# Altium PCB old_Sampler_DIOT.PCBDOC (part 5 of 8)
Units mm, origin at the board's own origin, x right, y up, seen from the top; angles counter-clockwise.
Board outline 221.17 x 100 mm, 4 copper layers (Top, GP1(GND), L3, Bot), stack 1.648 mm thick; 664 components, 413 nets, 2128 pads, 926 vias.
Unrouted connection lines stored in the file: 1.
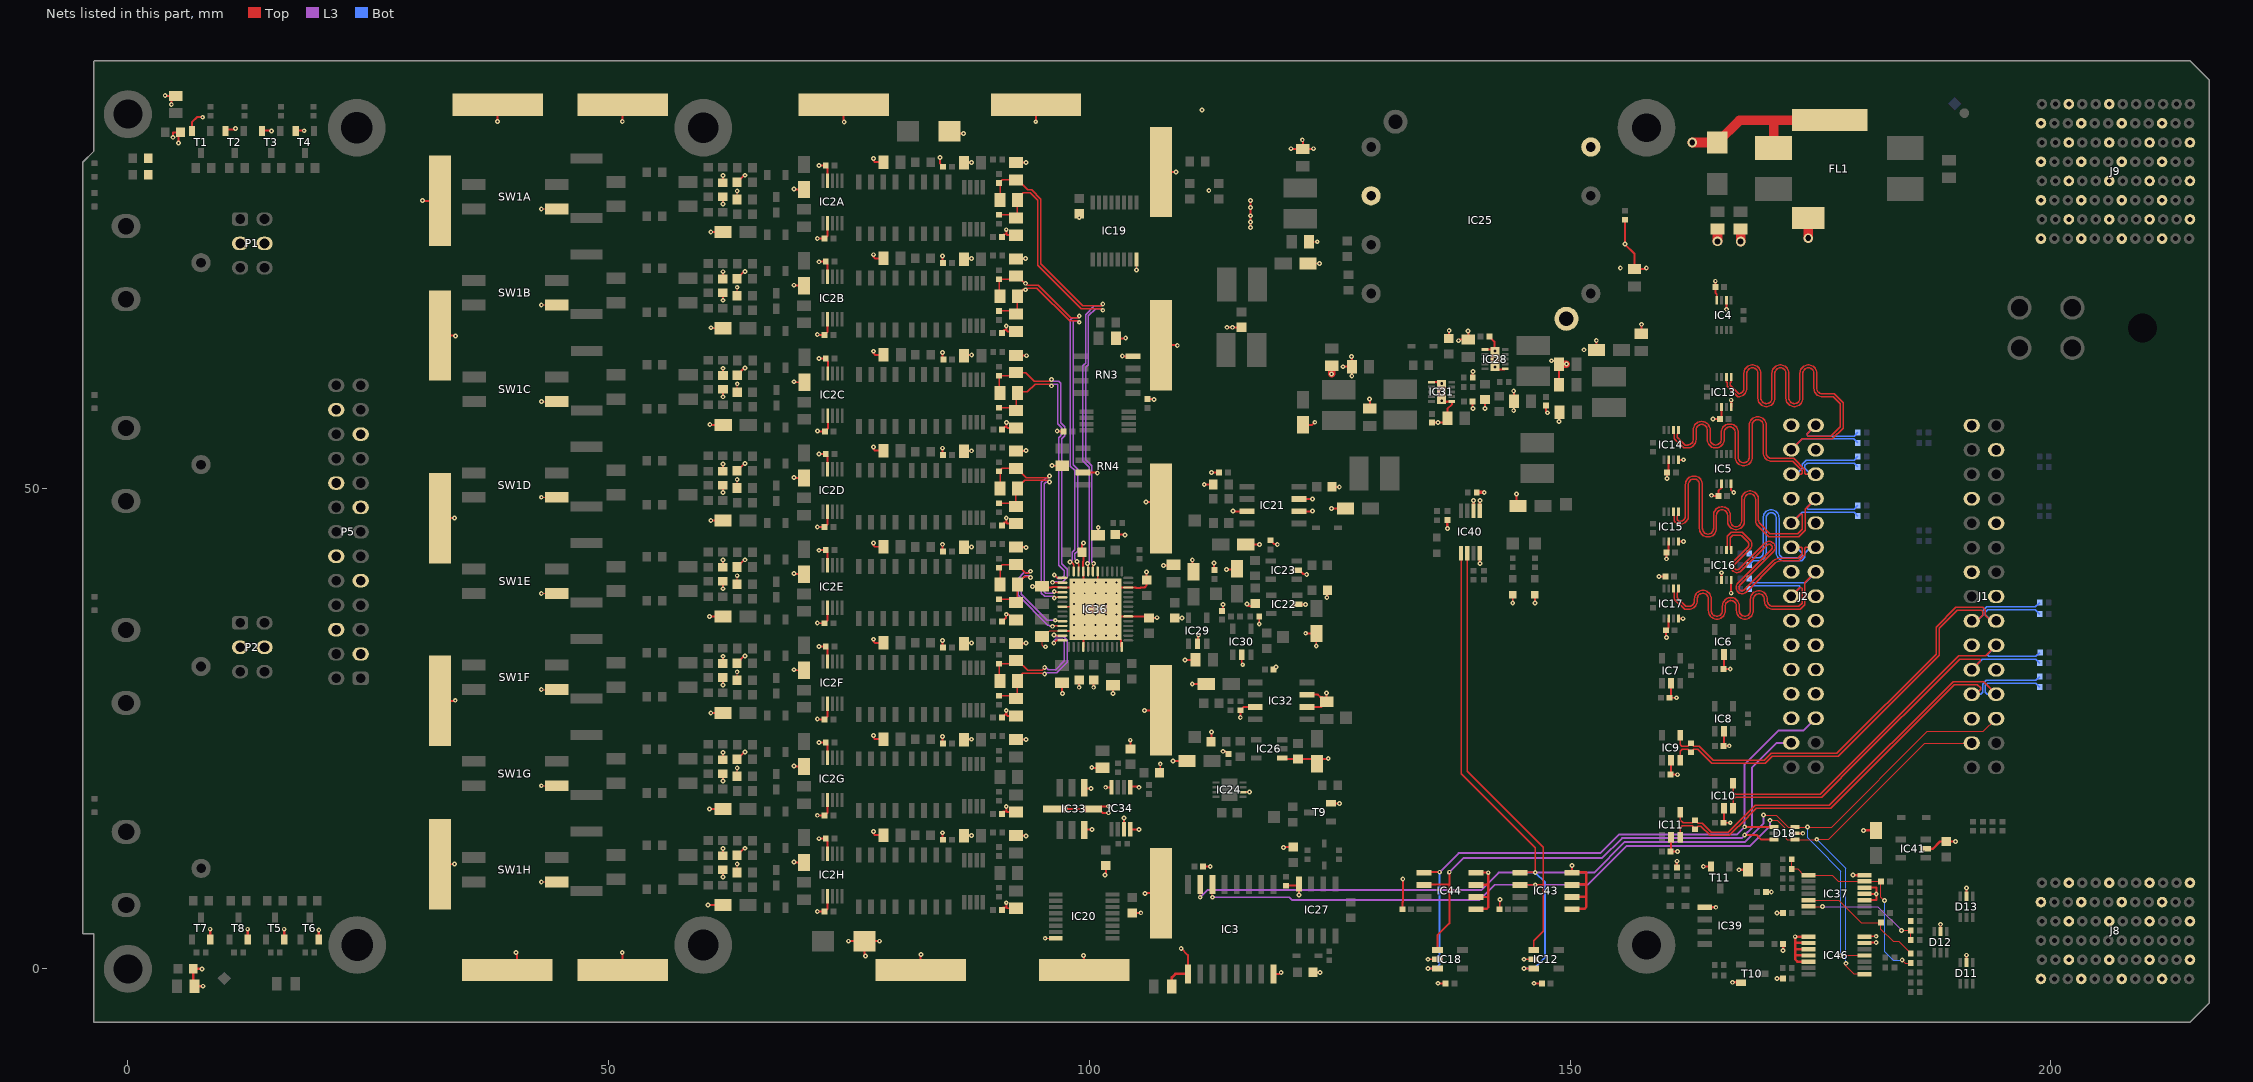
[diagram p6: the nets of this part, all layers, seen from the top]

## Via types
v1: diameter 0.5, hole 0.2, Top to Bot, tented both sides, 694 vias
v2: diameter 0.5, hole 0.2, Top to Bot, 186 vias
v3: diameter 0.6, hole 0.3, Top to Bot, tented both sides, 24 vias
v4: diameter 1, hole 0.6, Top to Bot, tented both sides, 12 vias
v5: diameter 0.6, hole 0.3, Top to Bot, 6 vias
v6: diameter 0.406, hole 0.203, Top to Bot, 2 vias
v7: diameter 1.27, hole 0.711, Top to Bot, 2 vias

## Nets (pads, with @x,y where several pads share a name; then routed paths per layer and width w, separated by ;. In a path a pad name is that pad's centre, name@x,y a point inside that pad or via, vN(x,y) a via of type N, cw(c..) or ccw(c..) an arc to the next point about the centre after c; other vN are vias at no path point) (continued)
EEM0_I2C.SCL: D18.1 IC3.14 IC12.1 IC40.2 IC43.6 IC46.1 J1.27 | length 153.9
  Top w0.127: v1(112.789,7.45) IC3.14@112.789,8.78 ; v2(170.775,15.45) 171.525,15.45 172.3,14.675 172.3,13.75 172.6,13.45 D18.1@173.4,13.45 175.625,13.45 v1(175.65,13.475) 176.875,13.475 186.89,23.49 J1.27@191.772,23.49 ; v2(178.675,0.575) 178.55,0.45 178.55,0.446 179.504,-0.508 IC46.1@180.631,-0.508
  Top w0.152: IC40.2@139.305,43.25 139.305,20.556 147.201,12.66 147.201,8.75 ; IC43.6@144.8,8.735 144.815,8.75 v2(146.371,8.75) 147.201,8.75 ; IC12.1@146.2,1.95 146.2,2.9 147.201,3.901 147.201,8.75
  L3 w0.203: v1(112.789,7.45) 120.785,7.45 121.046,7.188 121.067,7.188 ; 121.067,7.168 140.593,7.168 142.175,8.75 v2(146.371,8.75) 151.85,8.75 155.9,12.8 168.726,12.8 170.775,14.849 v2(170.775,15.45)
  Bot w0.127: v1(175.65,13.475) 178.675,10.45 178.675,9.1 v2(178.675,0.575)
EEM0_I2C.SDA: D18.3 IC3.15 IC12.3 IC40.1 IC43.5 IC46.4 J1.26 | length 161.4
  Top w0.127: v1(111.519,7.45) IC3.15@111.519,8.78 ; v2(170.1,16) 171.45,16 172.7,14.75 D18.3@173.4,14.75 v2(174.7,14.75) 177.2,14.75 187.15,24.7 192.982,24.7 J1.26@194.312,26.03 ; v2(178.159,1.4) 178.201,1.442 IC46.4@180.631,1.442
  Top w0.152: IC40.1@138.655,43.25 138.655,20.293 146.371,12.577 v2@146.371,10.055 ; IC43.5@145.03,10.055 v2@146.185,10.055 ; v2@146.22,10.02 v2@146.185,10.055 ; v2(146.371,10.02) v2@146.371,10.055 ; v2@146.185,10.055 v2@146.371,10.055
  Top w0.203: v2(145.2,0.05) IC12.3@146.2,0.05
  L3 w0.203: v1(111.519,7.45) 112.264,8.195 140.74,8.195 142.565,10.02 v2(146.371,10.02) 152.495,10.02 155.675,13.2 168.2,13.2 170.1,15.1 v2(170.1,16)
  Bot w0.127: v2(174.7,14.75) 174.7,13.625 175.525,12.8 178.159,10.166 v2(178.159,1.4)
  Bot w0.203: v2(145.2,0.05) 146.25,0.05 147.4,1.2 147.4,8.991 v2(146.371,10.02)
EEM_IO.LVDS_N5: IC9.4 J1.18 R18.1 R143.2 | length 51.5
  Top w0.152: IC9.4@161.45,24.3 161.45,23.324 161.622,23.152 162.232,23.152 R18.1@162.55,23.47 162.868,23.152 163.423,23.152 164.875,21.7 170.175,21.7 170.905,22.43 177.755,22.43 188.07,32.745 188.07,35.551 190.121,37.602 192.899,37.602 193.195,37.307 193.195,36.781 193.785,36.19 J1.18@194.312,36.19
  Bot w0.152: J1.18@194.312,36.19 193.82,36.19 193.195,36.816 193.195,37.101 193.441,37.348 196.813,37.348 198.382,37.348 R143.2@198.83,36.9
EEM_IO.LVDS_N6: IC10.3 J1.21 R144.2 | length 41.8
  Top w0.152: IC10.3@166.95,16.7 166.95,17.648 167.15,17.848 176.148,17.848 180.237,21.937 188.916,30.616 190.528,32.228 192.585,32.228 192.674,32.139 192.674,32.012 J1.21@191.772,31.11
  Bot w0.152: J1.21@191.772,31.11 192.86,32.198 198.432,32.198 R144.2@198.83,31.8
EEM_IO.LVDS_N7: IC11.4 J1.24 R19.1 R145.2 | length 49.3
  Top w0.152: IC11.4@161.45,16.33 IC11.4@161.45,16.3 161.45,15.48 161.748,15.182 162.682,15.182 R19.1@163,15.5 ; R19.1@163,15.47 163.318,15.152 163.726,15.152 164.679,14.2 166.444,14.2 169.244,17 176.972,17 189.838,29.866 193.017,29.866 J1.24@194.312,28.57
  Bot w0.152: J1.24@194.312,28.57 193.388,28.57 193.195,28.763 193.195,29.484 193.409,29.698 198.432,29.698 R145.2@198.83,29.3
EEM_IO.LVDS_N8: IC13.5 J2.3 R146.2 | length 48.3
  Top w0.152: IC13.5@166.75,61.55 166.75,61.049 166.652,60.951 166.652,60.7 167.267,60.085 167.545,59.807 ccw(c167.496,60.381) 168.072,60.381 168.072,61.939 cw(c168.953,61.939) 169.834,61.939 169.834,59.365 ccw(c170.41,59.365) 170.986,59.365 170.986,61.939 cw(c171.867,61.939) 172.748,61.939 172.748,59.365 ccw(c173.325,59.365) 173.901,59.365 173.901,61.939 cw(c174.782,61.939) 175.663,61.939 175.663,60.381 ccw(c176.239,60.381) 176.239,59.805 177.476,59.805 177.925,59.356 178.38,58.901 178.38,56.249 177.249,55.118 174.124,55.118 J2.3@173.002,53.996
  Bot w0.152: J2.3@173.002,53.996 174.124,55.118 179.512,55.118 R146.2@179.93,54.7
EEM_IO.LVDS_N9: IC14.5 J2.6 R147.2 | length 40.4
  Top w0.152: IC14.5@161.25,56.05 161.176,55.976 161.176,55.636 161.152,55.612 161.152,55.285 161.954,54.483 161.99,54.483 162.219,54.483 ccw(c162.219,55.06) 162.795,55.06 162.795,56.052 cw(c163.676,56.052) 163.676,56.933 cw(c163.676,56.052) 164.557,56.052 164.557,55.06 ccw(c165.133,55.06) 165.133,54.483 ccw(c165.133,55.06) 165.71,55.06 165.71,55.791 cw(c166.591,55.791) 166.591,56.672 cw(c166.591,55.791) 167.472,55.791 167.472,53.22 ccw(c168.048,53.22) 168.048,52.644 ccw(c168.048,53.22) 168.624,53.22 168.624,56.557 cw(c169.505,56.557) 169.505,57.438 cw(c169.505,56.557) 170.386,56.557 170.386,53.669 ccw(c170.962,53.669) 170.962,53.093 172.954,53.093 173.259,53.093 174.424,51.928 174.424,51.545 174.513,51.456 J2.6@175.542,51.456
  Bot w0.152: J2.6@175.542,51.456 175.049,51.456 174.424,52.081 174.424,52.366 174.658,52.6 179.53,52.6 R147.2@179.93,52.2
EEM_IO.LVDS_N10: IC15.5 J2.9 R148.2 | length 44.4
  Top w0.152: IC15.5@161.25,47.55 161.176,47.476 161.176,47.136 161.153,47.112 161.153,46.896 161.153,46.694 161.192,46.655 161.31,46.536 161.42,46.536 ccw(c161.42,47.112) 161.996,47.112 161.996,50.377 cw(c162.877,50.377) 163.758,50.377 163.758,45.798 ccw(c164.335,45.798) 164.911,45.798 164.911,47.183 cw(c165.792,47.183) 166.673,47.183 166.673,46.565 ccw(c167.249,46.565) 167.825,46.565 167.825,48.835 cw(c168.706,48.835) 169.587,48.835 169.587,46.683 ccw(c170.163,46.683) 169.756,46.275 170.781,45.25 172.496,45.25 173.65,45.25 174.145,45.745 174.145,47.23 174.067,47.308 173.934,47.308 J2.9@173.002,46.376
  Bot w0.152: J2.9@173.002,46.376 174.124,47.498 179.532,47.498 R148.2@179.93,47.1
EEM_IO.LVDS_N11: IC16.5 J2.12 R149.2 | length 46.4
  Top w0.152: IC16.5@166.75,43.55 166.677,43.624 166.677,43.964 166.653,43.988 166.653,44.853 166.9,45.1 167.769,45.1 167.829,45.04 167.946,44.923 168.503,44.366 cw(c168.269,44.133) 168.503,43.899 166.904,42.301 ccw(c167.352,41.851) 166.903,41.402 ccw(c167.352,41.851) 167.751,41.357 167.756,41.357 170.464,44.064 cw(c170.697,43.831) 170.931,44.064 cw(c170.697,43.831) 170.931,43.597 ; 170.93,43.597 167.442,40.109 ccw(c167.89,39.659) 167.44,39.211 ccw(c167.89,39.659) 168.29,39.165 168.295,39.165 171.358,42.229 cw(c171.832,41.754) 171.832,42.425 172.003,42.425 173.775,42.425 174.424,43.074 174.424,43.747 174.513,43.836 J2.12@175.542,43.836
  Bot w0.152: R149.2@168.614,42 169.061,42.448 169.315,42.448 169.544,42.448 ccw(c169.544,43.279) 170.375,43.279 170.375,46.915 cw(c170.901,46.915) 170.901,47.441 cw(c170.901,46.915) 171.427,46.915 171.427,43.279 ccw(c172.258,43.279) 172.258,42.448 174.073,42.448 174.1,42.474 174.424,42.799 174.424,43.226 175.034,43.836 J2.12@175.542,43.836
EEM_IO.LVDS_N12: IC17.5 J2.15 R150.2 | length 33.3
  Top w0.152: IC17.5@161.298,39.502 IC17.5@161.25,39.55 161.177,39.476 161.177,39.135 161.153,39.112 161.153,38.578 162.031,37.7 162.121,37.7 162.35,37.7 ccw(c162.35,38.276) 162.926,38.276 162.926,38.485 cw(c163.807,38.485) 163.807,39.366 cw(c163.807,38.485) 164.688,38.485 164.688,37.26 ccw(c165.264,37.26) 165.264,36.684 ccw(c165.264,37.26) 165.84,37.26 165.84,37.741 cw(c166.721,37.741) 166.721,38.622 cw(c166.721,37.741) 167.602,37.741 167.602,37.26 ccw(c168.179,37.26) 168.179,36.684 ccw(c168.179,37.26) 168.755,37.26 168.755,38.439 cw(c169.636,38.439) 169.636,39.32 cw(c169.636,38.439) 170.517,38.439 170.517,38.276 ccw(c171.093,38.276) 171.093,37.7 172.113,37.7 173.8,37.7 174.119,38.019 174.119,39.569 174.03,39.658 173.904,39.658 J2.15@173.002,38.756
  Bot w0.152: R150.2@168.614,39.452 169.041,39.879 169.047,39.873 173.815,39.873 173.904,39.784 173.904,39.658 J2.15@173.002,38.756
EEM_IO.LVDS_N13: J2.18
EEM_IO.LVDS_N14: J2.21
EEM_IO.LVDS_N15: J2.24
EEM_IO.LVDS_P5: IC9.3 J1.17 R18.2 R127.2 | length 51.5
  Top w0.152: IC9.3@161.45,21.7 161.45,22.644 161.654,22.848 162.232,22.848 R18.2@162.55,22.53 162.868,22.848 163.296,22.848 164.749,21.395 170.301,21.395 171.031,22.125 177.881,22.125 188.375,32.619 188.375,35.425 190.248,37.298 192.773,37.298 192.89,37.181 192.89,36.781 192.3,36.19 J1.17@191.772,36.19
  Bot w0.152: J1.17@191.772,36.19 192.28,36.19 192.89,36.8 192.89,37.227 193.315,37.652 196.939,37.652 198.382,37.652 R127.2@198.83,38.1
EEM_IO.LVDS_P6: IC10.4 J1.20 R128.2 | length 41.8
  Top w0.152: IC10.4@166.95,19.3 166.95,18.352 167.15,18.152 176.021,18.152 180.021,22.152 188.7,30.831 190.419,32.55 193.212,32.55 J1.20@194.312,33.65
  Bot w0.152: J1.20@194.312,33.65 193.41,32.748 193.41,32.622 193.53,32.502 198.432,32.502 R128.2@198.83,32.9
EEM_IO.LVDS_P7: IC11.3 J1.23 R19.2 R129.2 | length 49.1
  Top w0.152: IC11.3@161.45,13.73 161.45,14.674 161.654,14.878 162.682,14.878 R19.2@163,14.56 ; R19.2@163,14.53 163.318,14.848 163.6,14.848 164.552,13.895 166.57,13.895 167.297,14.622 167.678,15.003 169.37,16.695 177.098,16.695 189.964,29.561 192.363,29.561 192.696,29.228 192.696,29.102 192.164,28.57 J1.23@191.772,28.57
  Bot w0.152: J1.23@191.772,28.57 192.697,28.57 192.89,28.763 192.89,29.61 193.282,30.002 198.432,30.002 R129.2@198.83,30.4
EEM_IO.LVDS_P8: IC13.6 J2.2 R130.2 | length 46.5
  Top w0.152: IC13.6@166.25,61.55 166.25,61.049 166.348,60.951 166.348,60.574 167.267,59.654 167.421,59.5 167.496,59.5 ccw(c167.496,60.381) 168.377,60.381 168.377,61.939 cw(c168.953,61.939) 169.529,61.939 169.529,59.365 ccw(c170.41,59.365) 171.291,59.365 171.291,61.939 cw(c171.867,61.939) 172.444,61.939 172.444,59.365 ccw(c173.325,59.365) 174.206,59.365 174.206,61.939 cw(c174.782,61.939) 175.358,61.939 175.358,60.381 ccw(c176.239,60.381) 176.239,59.5 177.35,59.5 177.925,58.925 178.075,58.775 178.075,56.375 177.118,55.418 174.729,55.418 174.64,55.507 174.64,55.634 J2.2@175.542,56.536
  Bot w0.152: 174.729,55.418 174.724,55.423 ; J2.2@175.542,56.536 174.64,55.634 174.64,55.507 174.724,55.423 ; R130.2@179.93,55.8 179.553,55.423 174.724,55.423
EEM_IO.LVDS_P9: IC14.6 J2.5 R131.2 | length 40.9
  Top w0.152: IC14.6@160.75,56.05 160.823,55.976 160.823,55.636 160.847,55.612 160.847,55.159 161.827,54.179 161.99,54.179 162.219,54.179 ccw(c162.219,55.06) 163.1,55.06 163.1,56.052 cw(c163.676,56.052) 163.676,56.628 cw(c163.676,56.052) 164.252,56.052 164.252,55.06 ccw(c165.133,55.06) 165.133,54.179 ccw(c165.133,55.06) 166.014,55.06 166.014,55.791 cw(c166.591,55.791) 166.591,56.367 cw(c166.591,55.791) 167.167,55.791 167.167,53.22 ccw(c168.048,53.22) 168.048,52.339 ccw(c168.048,53.22) 168.929,53.22 168.929,56.557 cw(c169.505,56.557) 169.505,57.133 cw(c169.505,56.557) 170.081,56.557 170.081,53.669 ccw(c170.962,53.669) 170.962,52.788 172.954,52.788 173.133,52.788 174.119,51.801 174.119,51.545 174.03,51.456 J2.5@173.002,51.456
  Bot w0.152: J2.5@173.002,51.456 173.51,51.456 174.119,52.065 174.119,52.493 174.531,52.905 179.535,52.905 R131.2@179.93,53.3
EEM_IO.LVDS_P10: IC15.6 J2.8 R132.2 | length 45.5
  Top w0.152: IC15.6@160.75,47.757 IC15.6@160.75,47.55 160.824,47.476 160.824,47.136 160.848,47.112 160.848,46.77 160.848,46.567 161.184,46.231 161.192,46.231 161.42,46.231 ccw(c161.42,47.112) 162.301,47.112 162.301,50.377 cw(c162.877,50.377) 163.454,50.377 163.454,45.798 ccw(c164.335,45.798) 165.216,45.798 165.216,47.183 cw(c165.792,47.183) 166.368,47.183 166.368,46.565 ccw(c167.249,46.565) 168.13,46.565 168.13,48.835 cw(c168.706,48.835) 169.282,48.835 169.282,46.683 ccw(c170.163,46.683) 169.541,46.059 170.655,44.945 172.496,44.945 173.776,44.945 174.45,45.619 174.45,47.824 J2.8@175.542,48.916
  Bot w0.152: J2.8@175.542,48.916 174.64,48.014 174.64,47.887 174.729,47.798 174.729,47.802 179.532,47.802 R132.2@179.93,48.2
EEM_IO.LVDS_P11: IC16.6 J2.11 R133.2 | length 45.9
  Top w0.152: IC16.6@166.25,43.55 166.324,43.624 166.324,43.964 166.348,43.988 166.348,44.979 166.774,45.405 167.895,45.405 168.044,45.256 168.623,44.677 168.718,44.582 cw(c168.269,44.133) 168.718,43.684 167.119,42.084 ccw(c167.352,41.851) 167.119,41.617 ccw(c167.352,41.851) 167.586,41.617 ; 167.586,41.618 170.248,44.28 cw(c170.697,43.831) 171.146,44.28 cw(c170.697,43.831) 171.191,43.431 171.191,43.427 167.657,39.892 ccw(c167.89,39.659) 167.657,39.425 ccw(c167.89,39.659) 168.124,39.425 ; 168.124,39.426 171.143,42.444 cw(c171.832,41.754) 171.832,42.73 172.308,42.73 173.649,42.73 174.119,43.2 174.119,43.747 174.03,43.836 J2.11@173.002,43.836
  Bot w0.152: R133.2@168.614,43.2 169.061,42.752 169.315,42.752 169.544,42.752 ccw(c169.544,43.279) 170.07,43.279 170.07,46.915 cw(c170.901,46.915) 170.901,47.746 cw(c170.901,46.915) 171.732,46.915 171.732,43.279 ccw(c172.258,43.279) 172.258,42.752 173.947,42.752 174.1,42.905 174.119,42.925 174.119,43.211 173.494,43.836 J2.11@173.002,43.836
EEM_IO.LVDS_P12: IC17.6 J2.14 R134.2 | length 35.6
  Top w0.152: IC17.6@160.75,39.636 IC17.6@160.75,39.55 160.824,39.476 160.824,39.135 160.848,39.112 160.848,38.452 161.904,37.395 162.121,37.395 162.35,37.395 ccw(c162.35,38.276) 163.231,38.276 163.231,38.485 cw(c163.807,38.485) 163.807,39.062 cw(c163.807,38.485) 164.383,38.485 164.383,37.26 ccw(c165.264,37.26) 165.264,36.379 ccw(c165.264,37.26) 166.145,37.26 166.145,37.741 cw(c166.721,37.741) 166.721,38.317 cw(c166.721,37.741) 167.298,37.741 167.298,37.26 ccw(c168.179,37.26) 168.179,36.379 ccw(c168.179,37.26) 169.06,37.26 169.06,38.439 cw(c169.636,38.439) 169.636,39.015 cw(c169.636,38.439) 170.212,38.439 170.212,38.276 ccw(c171.093,38.276) 171.093,37.395 172.113,37.395 173.926,37.395 174.424,37.893 174.424,40.178 J2.14@175.542,41.296
  Bot w0.152: R134.2@168.614,40.552 168.981,40.184 174.43,40.184 J2.14@175.542,41.296
EEM_IO.LVDS_P13: J2.17
EEM_IO.LVDS_P14: J2.20
EEM_IO.LVDS_P15: J2.23
GA0: IC37.6 IC37.8 R90.1 R108.1 R109.2 R112.1 | length 21.5
  Top w0.127: R112.1@173.07,11.4 R108.1@173.07,10.4 173.65,10.4 174.3,9.75 IC37.8@174.8,9.75 177.261,9.75 177.911,9.1 IC37.6@180.6,9.1 R109.2@182.33,9.1 182.33,7.47 v2(182.7,7.1) ; v2(184.534,0.91) 184.844,0.6 R90.1@185.43,0.6
  Bot w0.127: v2(182.7,7.1) 182.7,1.79 183.58,0.91 v2(184.534,0.91)
GA1: IC37.12 R91.1 R107.2 | length 13.3
  Top w0.127: IC37.12@174.8,7.15 177.93,7.15 180.28,4.8 R107.2@182.33,4.8 182.33,4.134 183.596,2.868 184.162,2.868 R91.1@185.43,1.6
GA2: IC37.13 R94.1 R104.2 | length 12.5
  Top w0.127: IC37.13@175.001,6.475 v2(176.245,6.475) ; v2(184.475,4) R94.1@185.43,4 R104.2@185.43,3
  L3 w0.127: v2(176.245,6.475) 182,6.475 v2(184.475,4)
GA3: R99.1
GND: C1A.1 C1B.1 C1C.1 C1D.1 C1E.1 C1F.1 C1G.1 C1H.1 C3A.1 C3B.1 C3C.1 C3D.1 C3E.1 C3F.1 C3G.1 C3H.1 C4A.1 C4B.1 C4C.1 C4D.1 C4E.1 C4F.1 C4G.1 C4H.1 C5A.1 C5B.1 C5C.1 C5D.1 C5E.1 C5F.1 C5G.1 C5H.1 C7A.2 C7B.2 C7C.2 C7D.2 C7E.2 C7F.2 C7G.2 C7H.2 C8A.2 C8B.2 C8C.2 C8D.2 C8E.2 C8F.2 C8G.2 C8H.2 C9A.1 C9B.1 C9C.1 C9D.1 C9E.1 C9F.1 C9G.1 C9H.1 C10A.1 C10B.1 C10C.1 C10D.1 C10E.1 C10F.1 C10G.1 C10H.1 C11A.1 C11B.1 C11C.1 C11D.1 C11E.1 C11F.1 C11G.1 C11H.1 C12A.1 C12B.1 C12C.1 C12D.1 C12E.1 C12F.1 C12G.1 C12H.1 C13A.1 C13B.1 C13C.1 C13D.1 C13E.1 C13F.1 C13G.1 C13H.1 C14A.1 C14B.1 C14C.1 C14D.1 C14E.1 C14F.1 C14G.1 C14H.1 C15.1 C16.1 C17.1 C18.1 C19.1 C20.1 C21.1 C22.1 C23.1 C24.1 C25.1 C27.1 C28.1 C30.1 C32.1 C33.1 C34.2 C36.2 C37.1 C38.2 C39.1 C41.1 C43.1 C44.2 C45.1 C47.2 C48.1 C49.1 C50.2 C51.1 C52.2 C53.1 C54.1 C55.1 C56.1 C57.1 C58.1 C59.1 C60.1 C61.1 C62.1 C63.1 C64.1 C65.1 C66.1 C67.2 C68.1 C69.1 C70.1 C71.1 C72.1 C73.1 C74.1 C76.1 C77.2 C78.1 C79.1 C80.2 C81.1 C83.1 C84.2 C85.1 C86.1 C87.1 C88.1 C89.1 C90.1 C91.1 C92.1 C93.1 C94.1 C95.1 C96.1 C97.1 C98.1 C99.1 C100.1 C101.1 C102.1 C103.1 C104.1 C105.1 C106.1 C108.1 C109.1 C110.1 C111.1 C112.1 C113.1 C114.1 C115.1 C117.1 C118.2 C119.1 C120.1 C121.1 C122.1 C123.1 CLIP1.1 CLIP2.1 CLIP3.1 CLIP4.1 CLIP5.1 CLIP6.1 CLIP7.1 CLIP8.1 CLIP9.1 CLIP10.1 CLIP11.1 CLIP12.1 CLIP13.1 CLIP14.1 CLIP15.1 CLIP16.1 CLIP17.1 CLIP18.1 D5.2 D6.1 D11.2 D12.2 D13.2 D16.2 D18.2 FL1.4 IC2A.2 IC2A.9 IC2B.2 IC2B.9 IC2C.2 IC2C.9 IC2D.2 IC2D.9 IC2E.2 IC2E.9 IC2F.2 IC2F.9 IC2G.2 IC2G.9 IC2H.2 IC2H.9 IC3.1 IC3.8 IC4.2 IC4.4 IC5.2 IC5.4 IC6.2 IC7.2 IC8.2 IC9.2 IC10.2 IC11.2 IC12.2 IC13.2 IC13.4 IC14.2 IC14.4 IC15.2 IC15.4 IC16.2 IC16.4 IC17.2 IC17.4 IC18.2 IC19.8 IC20.8 IC21.3 IC21.6 IC21.7 IC22.2 IC23.2 IC24.6 IC25.3 IC25.5 IC25.8 IC26.1 IC27.4 IC28.1 IC28.6 IC28.11 IC29.2 IC30.2 IC31.1 IC31.6 IC31.11 IC32.3 IC32.6 IC32.7 IC33.3 IC33.4 IC33.5 IC33.8 IC34.3 IC34.4 IC34.5 IC34.8 IC36.3 IC36.7 IC36.12 IC36.18 IC36.26 IC36.32 IC36.38 IC36.46 IC36.49 IC36.53 IC37.3 IC37.4 IC37.5 IC37.7 IC39.1 IC40.4 IC40.5 IC40.6 IC41.2 IC43.1 IC43.2 IC43.3 IC43.4 IC44.1 IC44.2 IC44.3 IC44.4 IC46.6 IC46.7 IC46.8 IC46.9 IC46.10 IC46.11 IC46.12 J1.1 J1.4 J1.7 J1.10 J1.13 J1.16 J1.19 J1.22 J1.25 J2.1 J2.4 J2.7 J2.10 J2.13 J2.16 J2.19 J2.22 J2.25 J8.A2 J8.A4 J8.A6 J8.C1 J8.C5 J8.D2 J8.D4 J8.D6 J8.F1 J8.F5 J8.G2 J8.G4 J8.G6 J8.I1 J8.I5 J8.J2 J8.J4 J8.J6 J8.L1 J8.L5 J9.A2 J9.A4 J9.A6 J9.C1 J9.C3 J9.C5 J9.C7 J9.D2 J9.D4 J9.D6 J9.F1 J9.F3 J9.F5 J9.F7 J9.G2 J9.G4 J9.G6 J9.G8 J9.I1 J9.I3 J9.I5 J9.I7 J9.J2 J9.J4 J9.J6 J9.J8 J9.L1 J9.L3 J9.L5 J9.L7 LD7.1 LD8.1 P1.3 P1.4 P2.3 P2.4 P5.3 P5.6 P5.9 P5.12 P5.15 P5.18 P5.21 P5.24 R4A.1 R4B.1 R4C.1 R4D.1 R4E.1 R4F.1 R4G.1 R4H.1 R11A.1 R11B.1 R11C.1 R11D.1 R11E.1 R11F.1 R11G.1 R11H.1 R35.2 R38.2 R46.1 R47.1 R49.2 R52.1 R55.1 R57.1 R62.1 R63.1 R68.1 R71.1 R74.1 R75.1 R117.1 RN3.4 RN4.7 SW1A.3 SW1B.3 SW1C.3 SW1D.3 SW1E.3 SW1F.3 SW1G.3 SW1H.3 T1.2 T2.2 T3.2 T4.2 T5.2 T6.2 T7.2 T8.2 T9.2 T10.2 T11.2 | length 515.1
  Top w0.127: v1(42.989,9.05) SW1H.3@44.586,9.05 ; v1(42.989,19.05) SW1G.3@44.586,19.05 ; v1(42.989,29.05) SW1F.3@44.586,29.05 ; v1(42.989,39.05) SW1E.3@44.586,39.05 ; v1(42.989,49.05) SW1D.3@44.586,49.05 ; v1(42.989,69.05) SW1B.3@44.586,69.05 ; v1(42.989,79.05) SW1A.3@44.586,79.05 ; v1(43.002,59.006) SW1C.3@44.599,59.006 ; C5H.1@63.362,10.02 v1(63.362,10.897) ; C5G.1@63.362,20.02 v1(63.362,20.897) ; C5F.1@63.362,30.02 v1(63.362,30.897) ; C5E.1@63.362,40.02 v1(63.362,40.897) ; C5D.1@63.362,50.02 v1(63.362,50.897) ; C5B.1@63.362,70.02 v1(63.362,70.897) ; C5A.1@63.362,80.02 v1(63.362,80.897) ; C5C.1@63.375,59.976 v1(63.375,60.853) ; v1(95.397,3.187) IC20.8@96.499,3.187 ; v1(95.444,33.505) 95.219,33.505 95.069,33.655 C96.1@95.069,34.566 95.28,34.566 95.896,35.182 96.501,35.182 96.522,35.161 97.185,35.161 IC36.12@97.189,35.165 ; v1(104.904,72.695) IC19.8@104.904,73.797 ; C50.2@122.744,73.38 v1(123.944,73.38) ; C49.1@122.844,75.63 v1(123.694,75.63)
  Top w0.203: v2(3.869,90.83) 3.894,90.805 C34.2@4.953,90.805 4.509,90.361 v2(4.509,89.907) ; v2(4.696,86.488) 4.696,86.982 4.716,87.002 R46.1@5.469,87.002 5.244,86.778 v2(5.244,85.909) ; T1.2@6.65,87.15 6.65,88.05 7.18,88.58 v1(7.771,88.58) ; T2.2@10.244,87.3 11.094,87.3 v1(11.194,87.4) ; T3.2@13.994,87.2 14.894,87.2 v1(14.944,87.15) ; T4.2@17.48,87.2 18.3,87.2 v1(18.33,87.17) ; v1(30.629,79.919) 30.668,79.88 CLIP1.1@32.444,79.88 ; CLIP2.1@32.444,10.88 33.944,10.88 v1(33.969,10.905) ; CLIP5.1@32.444,27.88 34.019,27.88 34.044,27.905 v1(34.044,27.93) ; CLIP6.1@32.444,46.88 33.969,46.88 33.994,46.905 v1(33.969,46.905) ; CLIP7.1@32.444,65.88 34.019,65.88 v1(34.069,65.83) ; v1(38.419,88.13) 38.419,88.169 38.344,88.244 38.444,88.344 CLIP18.1@38.444,89.88 ; v1(40.357,1.687) 40.444,1.6 CLIP13.1@40.444,-0.12 ; v1(51.406,1.687) 51.444,1.649 CLIP17.1@51.444,-0.12 ; v1(51.419,88.13) 51.419,88.169 51.344,88.244 51.444,88.344 CLIP8.1@51.444,89.88 ; v1(60.344,6.63) C11H.1@61.894,6.63 ; v1(60.469,36.655) 60.494,36.63 C11E.1@61.894,36.63 ; v1(60.494,16.63) C11G.1@61.894,16.63 ; v1(60.519,56.605) 60.538,56.586 C11C.1@61.907,56.586 ; v1(60.619,26.605) 60.644,26.63 C11F.1@61.894,26.63 ; v1(60.619,46.63) C11D.1@61.894,46.63 ; v1(60.619,76.63) C11A.1@61.894,76.63 ; v1(60.644,66.68) 60.694,66.63 C11B.1@61.894,66.63 ; v1(61.876,9.54) R11H.1@61.876,10.312 ; R4H.1@61.876,11.76 v1@61.876,12.52 ; v1(61.876,19.54) R11G.1@61.876,20.312 ; R4G.1@61.876,21.76 v1@61.876,22.52 ; v1(61.876,29.54) R11F.1@61.876,30.312 ; R4F.1@61.876,31.76 v1@61.876,32.52 ; v1(61.876,39.54) R11E.1@61.876,40.312 ; R4E.1@61.876,41.76 v1@61.876,42.52 ; v1(61.876,49.54) R11D.1@61.876,50.312 ; R4D.1@61.876,51.76 v1@61.876,52.52 ; v1(61.876,69.54) R11B.1@61.876,70.312 ; R4B.1@61.876,71.76 v1@61.876,72.52 ; v1(61.876,79.54) R11A.1@61.876,80.312 ; R4A.1@61.876,81.76 v1@61.876,82.52 ; v1(61.889,59.496) R11C.1@61.889,60.268 ; R4C.1@61.889,61.716 v1@61.889,62.476 ; C1H.1@63.362,11.798 v1@64.112,12.548 ; C1G.1@63.362,21.798 v1@64.112,22.548 ; C1F.1@63.362,31.798 v1@64.112,32.548 ; C1E.1@63.362,41.798 v1@64.112,42.548 ; C1D.1@63.362,51.798 v1@64.112,52.548 ; C1B.1@63.362,71.798 v1@64.112,72.548 ; C1A.1@63.362,81.798 v1@64.112,82.548 ; C1C.1@63.375,61.754 v1@64.125,62.504 ; v1(69.262,11.113) 69.317,11.058 C8H.2@70.329,11.058 ; v1(69.262,21.113) 69.317,21.058 C8G.2@70.329,21.058 ; v1(69.262,31.113) 69.317,31.058 C8F.2@70.329,31.058 ; v1(69.262,41.113) 69.317,41.058 C8E.2@70.329,41.058 ; v1(69.262,51.113) 69.317,51.058 C8D.2@70.329,51.058 ; v1(69.262,71.113) 69.317,71.058 C8B.2@70.329,71.058 ; v1(69.262,81.113) 69.317,81.058 C8A.2@70.329,81.058 ; v1(69.275,61.069) 69.33,61.014 C8C.2@70.341,61.014 ; v1(71.699,5.974) 71.724,5.948 C10H.1@72.465,5.948 72.775,6.258 IC2H.2@72.775,7.567 ; v1(71.699,15.974) 71.724,15.948 C10G.1@72.465,15.948 72.775,16.258 IC2G.2@72.775,17.567 ; v1(71.699,25.974) 71.724,25.948 C10F.1@72.465,25.948 72.775,26.258 IC2F.2@72.775,27.567 ; v1(71.699,35.974) 71.724,35.948 C10E.1@72.465,35.948 72.775,36.258 IC2E.2@72.775,37.567 ; v1(71.699,45.974) 71.724,45.948 C10D.1@72.465,45.948 72.775,46.258 IC2D.2@72.775,47.567 ; v1(71.699,65.974) 71.724,65.948 C10B.1@72.465,65.948 72.775,66.258 IC2B.2@72.775,67.567 ; v1(71.699,75.974) 71.724,75.948 C10A.1@72.465,75.948 72.775,76.258 IC2A.2@72.775,77.567 ; v1(71.711,55.93) 71.737,55.904 C10C.1@72.478,55.904 72.788,56.214 IC2C.2@72.788,57.523 ; v1(71.887,13.543) 71.894,13.55 C9H.1@72.575,13.55 ; v1(71.887,23.543) 71.894,23.55 C9G.1@72.575,23.55 ; v1(71.887,33.543) 71.894,33.55 C9F.1@72.575,33.55 ; v1(71.887,43.543) 71.894,43.55 C9E.1@72.575,43.55 ; v1(71.887,53.543) 71.894,53.55 C9D.1@72.575,53.55 ; v1(71.887,63.493) 71.894,63.5 C9C.1@72.575,63.5 ; v1(71.887,73.543) 71.894,73.55 C9B.1@72.575,73.55 ; v1(71.887,83.543) 71.894,83.55 C9A.1@72.575,83.55 ; C9H.1@72.565,13.448 72.775,13.238 IC2H.9@72.775,11.967 ; C9G.1@72.565,23.448 72.775,23.238 IC2G.9@72.775,21.967 ; C9F.1@72.565,33.448 72.775,33.238 IC2F.9@72.775,31.967 ; C9E.1@72.565,43.448 72.775,43.238 IC2E.9@72.775,41.967 ; C9D.1@72.565,53.448 72.775,53.238 IC2D.9@72.775,51.967 ; C9B.1@72.565,73.448 72.775,73.238 IC2B.9@72.775,71.967 ; C9A.1@72.565,83.448 72.775,83.238 IC2A.9@72.775,81.967 ; C9C.1@72.578,63.404 72.788,63.194 IC2C.9@72.788,61.923 ; CLIP9.1@74.444,89.88 74.444,88.123 v1(74.494,88.073) ; v1(74.944,2.88) D6.1@76.594,2.88 ; v1(76.714,1.336) 76.594,1.456 D6.1@76.594,2.88 ; v1(77.544,14.28) 77.544,14.055 77.694,13.905 C3H.1@78.569,13.905 ; v1(77.544,24.28) 77.544,24.055 77.694,23.905 C3G.1@78.569,23.905 ; v1(77.544,34.28) 77.544,34.055 77.694,33.905 C3F.1@78.569,33.905 ; v1(77.544,44.28) 77.544,44.055 77.694,43.905 C3E.1@78.569,43.905 ; v1(77.544,54.28) 77.544,54.055 77.694,53.905 C3D.1@78.569,53.905 ; v1(77.544,74.28) 77.544,74.055 77.694,73.905 C3B.1@78.569,73.905 ; v1(77.544,84.28) 77.544,84.055 77.694,83.905 C3A.1@78.569,83.905 ; v1(77.557,64.236) 77.557,64.011 77.707,63.861 C3C.1@78.582,63.861 ; v1(78.169,2.88) D6.1@76.594,2.88 ; CLIP16.1@82.444,-0.12 82.444,1.455 v1(82.469,1.48) ; v1(84.444,84.38) 84.444,83.78 C13A.1@84.794,83.43 ; v1(84.719,14.155) 84.719,13.505 C13H.1@84.794,13.43 ; v1(84.719,24.155) 84.719,23.505 C13G.1@84.794,23.43 ; v1(84.719,34.155) 84.719,33.505 C13F.1@84.794,33.43 ; v1(84.719,44.155) 84.719,43.505 C13E.1@84.794,43.43 ; v1(84.719,54.155) 84.719,53.505 C13D.1@84.794,53.43 ; v1(84.719,74.155) 84.719,73.505 C13B.1@84.794,73.43 ; v1(84.732,64.111) 84.732,63.461 C13C.1@84.807,63.386 ; D5.2@85.344,86.88 v1(86.913,86.88) ; C12H.1@86.944,13.83 86.994,13.88 v1(87.744,13.88) ; C12G.1@86.944,23.83 86.994,23.88 v1(87.744,23.88) ; C12F.1@86.944,33.83 86.994,33.88 v1(87.744,33.88) ; C12E.1@86.944,43.83 86.994,43.88 v1(87.744,43.88) ; C12D.1@86.944,53.83 86.994,53.88 v1(87.744,53.88) ; C12B.1@86.944,73.83 86.994,73.88 v1(87.744,73.88) ; C12A.1@86.944,83.83 86.994,83.88 v1(87.744,83.88) ; C12C.1@86.957,63.786 87.007,63.836 v1(87.757,63.836) ; C14H.1@90.894,6.13 90.969,6.205 90.969,6.33 91.045,6.406 91.353,6.406 ; C14G.1@90.894,16.13 90.994,16.23 90.994,16.38 91.327,16.38 91.353,16.406 ; C14F.1@90.894,26.13 91.262,26.498 91.353,26.406 ; C14D.1@90.894,46.13 91.119,46.355 91.119,46.405 91.12,46.406 91.353,46.406 ; C14B.1@90.894,66.13 91.094,66.33 91.094,66.43 91.329,66.43 91.353,66.406 ; C14A.1@90.894,76.13 91.069,76.305 91.069,76.38 91.095,76.406 91.353,76.406 ; C14C.1@90.907,56.086 91.183,56.362 91.366,56.362 ; v1@91.307,36.867 91.307,36.543 C14E.1@90.894,36.13 90.919,36.13 91.323,36.534 91.323,36.85 v1(91.353,36.88) 91.461,36.988 92.143,36.306 C4E.1@92.353,36.306 ; v1(91.353,6.88) 91.353,6.406 ; v1(91.353,16.88) 91.353,16.406 ; v1(91.353,26.88) 91.353,26.406 ; v1(91.353,46.88) 91.353,46.406 ; v1(91.353,66.88) 91.353,66.406 ; v1(91.353,76.88) 91.353,76.406 ; v1(91.366,56.836) 91.366,56.362 ; C4H.1@92.353,6.306 91.453,6.306 91.353,6.406 ; C7H.2@92.353,13.856 93.393,13.856 v1(93.419,13.83) ; C4G.1@92.353,16.306 91.453,16.306 91.353,16.406 ; C7G.2@92.353,23.856 93.393,23.856 v1(93.394,23.855) ; C4F.1@92.353,26.306 91.453,26.306 91.353,26.406 ; C7F.2@92.353,33.856 93.37,33.856 v1(93.419,33.905) ; C7E.2@92.353,43.856 93.368,43.856 v1(93.394,43.83) ; C4D.1@92.353,46.306 91.453,46.306 91.353,46.406 ; C7D.2@92.353,53.856 93.345,53.856 v1(93.394,53.905) ; C4B.1@92.353,66.306 91.453,66.306 91.353,66.406 ; C7B.2@92.353,73.856 93.32,73.856 v1(93.344,73.88) ; C4A.1@92.353,76.306 91.453,76.306 91.353,76.406 ; C7A.2@92.353,83.856 93.395,83.856 v1(93.419,83.88) ; C4C.1@92.366,56.262 91.466,56.262 91.366,56.362 ; C7C.2@92.366,63.812 93.412,63.812 v1(93.444,63.78) ; v1(94.069,39.78) 94.084,39.795 C97.1@95.069,39.795 95.199,39.665 96.091,39.665 96.146,39.72 97.134,39.72 IC36.3@97.189,39.665 98.364,39.665 IC36.53@99.364,38.665 ; v1(94.419,88.105) 94.444,88.13 CLIP10.1@94.444,89.88 ; v1(96.119,52.355) 96.144,52.33 C106.1@97.194,52.33 ; IC33.8@96.444,16.634 IC33.4@100.394,16.634 IC33.4@100.969,16.634 ; v1(96.644,55.955) 96.694,55.905 C105.1@97.319,55.905 ; C91.1@97.155,29.757 97.155,28.669 v1(97.194,28.63) ; IC36.12@97.189,35.165 98.364,35.165 IC36.53@99.364,36.165 ; IC36.7@97.189,37.665 IC36.53@100.364,37.665 ; C32.1@98.859,78.634 C32.1@98.944,78.549 ; v1(98.933,29.285) C89.1@98.933,30.035 ; v1(98.944,78.13) C32.1@98.944,78.549 ; C32.1@98.957,78.536 C32.1@98.944,78.549 ; RN4.7@99.319,51.62 100.779,51.62 v1(100.819,51.58) ; IC36.18@99.364,33.49 IC36.53@99.364,36.165 ; v1(99.369,44.305) 99.219,44.155 C90.1@99.219,43.33 99.364,43.185 99.364,42.408 99.309,42.353 99.309,41.395 IC36.49@99.364,41.34 IC36.53@99.364,38.665 ; v1(99.394,1.38) 99.444,1.33 CLIP14.1@99.444,-0.12 ; IC33.3@99.464,14.434 99.515,14.484 v1(100.272,14.484) ; IC33.5@99.464,18.834 99.535,18.763 v1(100.173,18.763) ; v1(100.244,20.93) 100.272,20.902 C99.1@101.374,20.902 ; C87.1@100.432,30.035 100.432,29.297 v1(100.444,29.285) ; IC36.46@100.864,41.34 IC36.53@100.864,37.665 ; C98.1@100.915,45.121 v1(100.915,45.921) ; v1(101.632,9.777) 101.714,9.86 C101.1@101.714,10.766 ; v1(101.694,18.881) 102.246,18.881 IC34.8@102.332,18.967 ; v1(101.971,16.23) 101.373,16.23 IC33.4@100.969,16.634 ; v1(101.971,16.909) 101.944,16.882 101.217,16.882 IC33.4@100.969,16.634 ; v1(102.444,28.63) C95.1@102.444,29.48 ; C88.1@102.694,45.18 103.644,45.18 v1(103.694,45.13) ; C103.1@102.744,65.58 103.719,65.58 103.744,65.605 v1(103.769,65.605) ; IC36.26@103.364,33.49 103.285,33.569 103.285,34.194 v1(102.814,34.665) v1(101.714,35.765) v1(100.614,36.865) IC36.53@100.614,37.415 ; v1(103.419,63.755) 103.464,63.71 RN3.4@104.544,63.71 ; IC34.3@103.594,14.505 v1(103.594,15.68) ; IC34.4@104.244,14.505 104.245,14.506 v1(105.149,14.506) ; IC34.5@104.244,18.905 104.306,18.905 104.367,18.967 104.983,18.967 105.069,18.881 v1(105.149,18.881) ; v1(104.244,23.786) 104.269,23.81 C100.1@104.269,22.88 ; C33.1@104.444,5.83 v1(105.344,5.83) ; v1@105.744,26.88 CLIP3.1@107.444,26.88 ; v1(105.794,7.83) 105.844,7.88 CLIP15.1@107.444,7.88 ; v1(105.869,48.555) 106.769,48.555 CLIP12.1@107.444,47.88 ; v1(105.944,41.28) C92.1@105.944,40.43 105.944,39.88 105.729,39.665 105.317,39.665 105.262,39.611 104.866,39.611 104.811,39.665 IC36.38@104.039,39.665 102.864,39.665 IC36.53@100.864,37.665 ; C104.1@106.019,59.255 106.694,59.255 v1(106.719,59.23) ; v1(107.019,36.53) 106.994,36.505 C93.1@106.194,36.505 106.034,36.665 IC36.32@104.039,36.665 101.364,36.665 IC36.53@100.614,37.415 ; C102.1@107.294,20.409 107.369,20.484 v1(107.369,21.33) ; CLIP4.1@107.444,64.88 109.094,64.88 v1(109.144,64.83) ; CLIP11.1@107.444,82.88 v1(109.019,82.88) ; v1(107.713,41.94) 108.662,41.94 C94.1@108.752,42.03 ; v1@108.694,21.63 C63.1@110.144,21.63 ; C71.1@108.86,36.48 108.885,36.505 v1(109.642,36.505) ; v1(109.544,2.13) 110.249,1.425 IC3.1@110.249,-0.52 ; v1(109.944,32.13) C68.1@111.044,32.13 ; v1(110.694,29.63) C84.2@112.144,29.63 ; v1(110.7,42.53) 110.7,41.411 C77.2@110.817,41.294 ; IC29.2@111.244,33.832 111.297,33.885 111.297,34.689 v1(111.35,34.742) ; C15.1@111.819,10.63 112.544,10.63 v1(112.569,10.655) ; v1(111.944,50.38) R52.1@112.894,50.38 ; R63.1@112.644,23.63 112.694,23.68 v1(112.694,24.63) ; v1(112.694,51.63) C39.1@113.494,51.63 ; v1(112.944,42.224) 112.944,41.542 C45.1@113.021,41.465 ; C76.1@113.771,37.222 113.894,37.345 v1(113.894,37.896) ; v1(113.894,22.63) 114.144,22.63 C64.1@114.444,22.33 ; v1(114.244,41.554) 115.271,41.554 C44.2@115.325,41.607 ; v1@114.269,66.755 v1(114.294,66.73) C51.1@115.819,66.73 ; v1(114.944,47.63) 114.98,47.594 IC21.3@116.393,47.594 ; v1(115.694,26.13) R75.1@115.694,26.91 116.029,27.245 IC32.3@117.244,27.245 ; IC30.2@115.845,32.679 115.845,31.729 v1(115.944,31.63) ; IC24.6@115.969,18.384 115.978,18.393 116.633,18.393 v1(116.642,18.402) ; C38.2@116.244,44.13 v1(117.694,44.13) ; v1(116.399,37.965) 116.399,37.885 116.52,37.764 116.52,37.748 116.999,37.748 C41.1@117.267,38.016 ; v1@116.744,76.93 v1(116.744,77.105) v1(116.744,77.68) v1(116.744,79.18) v1(116.744,79.93) v1@116.819,80.005 ; v1(117.664,35.88) R71.1@117.664,36.63 ; R55.1@118.819,44.561 118.839,44.561 119.027,44.373 119.027,44.353 119.207,44.173 119.499,44.173 v1(119.542,44.13) ; IC3.8@119.139,-0.52 119.794,-0.52 v1(119.944,-0.37) ; C83.1@119.144,31.13 119.396,31.382 v1(119.4,31.382) ; IC26.1@120.044,21.93 120.144,21.83 C61.1@121.694,21.83 124.794,21.83 v1(124.844,21.88) ; v1(120.194,12.63) 120.244,12.68 C65.1@121.194,12.68 ; R62.1@120.444,8.66 121.619,8.66 IC27.4@121.789,8.83 121.789,7.684 v1(121.793,7.68) ; v1(120.969,85.305) 120.994,85.28 C48.1@122.194,85.28 ; IC23.2@121.544,41.469 121.819,41.469 122.216,41.072 122.537,41.072 v1(122.594,41.015) ; IC22.2@121.594,37.915 122.476,37.915 v1(122.48,37.911) ; IC21.6@121.793,47.594 123.158,47.594 v1(123.194,47.63) ; IC21.7@121.793,48.864 123.178,48.864 v1(123.194,48.88) ; v1(122.144,86.23) 122.194,86.18 C48.1@122.194,85.28 ; C60.1@122.194,56.58 123.169,56.58 v1(123.444,56.855) ; v1(122.494,34.905) 122.519,34.88 C47.2@123.594,34.88 v1(123.594,33.58) ; IC32.6@122.644,27.245 124.159,27.245 C81.1@124.694,27.78 C81.1@124.569,27.905 ; IC32.7@122.644,28.515 123.759,28.515 123.994,28.28 124.194,28.28 C81.1@124.569,27.905 ; C72.1@123.244,-0.37 v1(123.994,-0.37) ; v1(123.294,85.305) 123.269,85.28 C48.1@122.194,85.28 ; v1(124.644,28.705) 124.644,27.98 C81.1@124.569,27.905 ; v1(124.694,38.63) 124.744,38.68 C43.1@124.744,39.38 ; T9.2@125.129,17.217 126.007,17.217 v1(126.019,17.205) ; v1(125.194,47.88) C80.2@126.644,47.88 ; C37.1@125.244,50.13 v1(125.994,50.13) ; v1(126.369,62.63) C58.1@127.294,62.63 ; v1(127.269,63.68) 127.294,63.655 C58.1@127.294,62.63 ; v1(127.294,61.68) C58.1@127.294,62.63 ; v1(129.136,59.27) 129.161,59.245 C79.1@129.161,58.27 ; C122.1@132.58,6.25 132.58,6.95 132.587,6.95 132.596,6.958 v2(132.596,9.36) ; v2(135.2,1) IC18.2@136.2,1 ; IC31.6@135.591,61.02 136.141,61.02 136.641,60.52 v5(136.641,60.02) 136.641,59.445 137.141,58.945 137.216,59.02 IC31.1@137.691,59.02 137.691,58.695 137.241,58.245 C86.1@137.241,57.27 137.066,57.095 137.066,56.82 v1(136.266,56.82) C78.1@135.641,56.82 ; v2(136.248,-1.493) 136.35,-1.493 136.35,-1.5 C121.1@137.05,-1.5 ; C66.1@137.391,65.57 137.391,66.37 v1(137.416,66.395) ; v1(138.378,65.34) 138.494,65.455 C74.1@139.409,65.455 139.409,66.309 v1(139.378,66.34) ; C85.1@139.841,59.02 139.841,58.32 v1(139.891,58.27) ; R74.1@139.861,61.52 139.861,62.115 v1(139.891,62.145) ; IC44.2@140.2,7.465 141.479,7.465 ; IC44.4@140.2,10.005 v2(141.479,10.005) ; v1(141.141,58.27) R68.1@141.141,59.22 ; IC28.1@141.142,64.415 141.824,64.415 IC28.11@142.192,64.046 ; C73.1@141.591,65.77 142.125,65.236 142.125,64.35 v5(142.192,64.282) IC28.11@142.192,64.046 ; v5(142.192,62.59) 142.442,62.34 143.168,62.34 IC28.6@143.242,62.415 ; v5(142.192,63.415) IC28.11@142.192,64.046 ; C120.1@142.68,6.25 142.68,6.95 142.687,6.95 142.7,6.963 v2(142.7,7.2) ; v2(144.03,38.039) LD7.1@144.03,38.925 ; v1(144.128,58.068) 144.148,58.088 144.148,60.071 v1(144.128,60.09) ; v1(144.428,49.403) 144.428,48.305 C67.2@144.569,48.164 ; v2(145.2,1) IC12.2@146.2,1 ; v2(146.248,-1.493) 146.35,-1.493 146.35,-1.5 C119.1@147.05,-1.5 ; v2(146.33,38.039) LD8.1@146.33,38.925 ; C69.1@147.512,58.594 147.512,57.957 v1(147.628,57.84) ; v1(148.046,63.248) 148.506,63.248 C55.1@148.853,62.901 C56.1@148.853,60.742 ; v1(148.847,56.922) 148.904,56.979 C57.1@148.904,57.872 ; v2(150.196,10.758) 150.2,10.754 IC43.4@150.2,10.005 ; v1(152.723,65.355) 152.748,65.33 C52.2@152.748,64.38 ; R57.1@155.694,77.91 v1(155.694,75.38) 156.694,74.38 C53.1@156.694,72.78 158.03,72.78 v1(157.924,72.886) ; C54.1@157.417,66.057 v2(157.417,67.042) ; v2(159.244,40.818) C25.1@159.923,40.818 ; v1(160.017,42.648) 160.017,43.305 160.25,43.538 IC15.2@160.25,44.45 ; v1(160.025,34.475) 159.967,34.533 C27.1@159.967,35.222 160.25,35.505 IC17.2@160.25,36.45 ; v1(160.088,51) C30.1@160.088,51.62 160.25,51.782 IC14.2@160.25,52.95 ; C16.1@160.35,28.2 160.5,28.35 IC7.2@160.5,29.7 IC7.2@160.45,29.65 ; C16.1@160.4,28.2 v2(161.05,28.2) ; C18.1@160.45,12.2 160.5,12.25 IC11.2@160.5,13.7 ; C20.1@160.45,20.2 160.5,20.25 IC9.2@160.5,21.7 ; C18.1@160.5,12.2 v2(161.15,12.2) ; C20.1@160.5,20.2 v2(161.15,20.2) ; IC14.4@161.25,52.95 v2(161.8,52.95) ; IC17.4@161.25,36.45 161.7,36.45 v1(161.725,36.425) ; IC15.4@161.25,44.45 v1(161.8,44.45) ; v1(164.712,49.254) 164.778,49.188 C22.1@165.418,49.188 165.418,49.709 165.75,50.041 IC5.2@165.75,50.45 ; v2(164.856,57.185) C28.1@165.564,57.185 165.75,57.371 IC13.2@165.75,58.45 ; v2(165.1,71.525) C23.1@165.1,70.9 165.1,70.3 165.25,70.15 IC4.4@165.25,69.55 ; IC16.2@165.75,40.45 v1(165.75,41.2) ; C19.1@165.95,15.2 166,15.25 IC10.2@166,16.7 ; C21.1@165.95,23.2 166,23.25 IC8.2@166,24.7 ; C19.1@166,15.2 v2(166.65,15.2) ; C21.1@166,23.2 v2(166.55,23.2) ; IC6.2@166,32.7 166,31.2 v2(166.65,31.2) ; v2(166.25,68.6) IC4.2@166.25,69.55 ; IC5.4@166.75,50.45 166.75,49.802 v1(167.012,49.54) ; v1(166.75,39.075) IC16.4@166.75,40.45 ; v2(171.5,-1) C123.1@172.15,-1 ; v2(171.5,5.8) C108.1@172.15,5.8 ; D18.2@173.4,14.1 v2(174.2,14.1) ; IC37.3@180.6,7.15 181.84,7.15 v2(181.84,7.8) ; IC37.4@180.6,7.8 v2(181.84,7.8) ; IC37.5@180.6,8.45 181.84,8.45 v2(181.84,7.8) ; IC46.6@180.631,2.742 v2(181.833,2.742) ; IC46.7@180.631,3.392 v2(181.833,3.392) ; D12.2@188.525,3.875 v2(188.525,4.635) ; v2(191.225,1.425) 191.225,0.655 D11.2@191.23,0.65 ; D13.2@191.225,7.55 v2(191.225,8.4) ; IC36.53@99.364,36.165 IC36.53@100.614,37.415 ; IC36.53@99.364,38.665 IC36.53@100.364,37.665 ; IC36.53@100.364,37.665 IC36.53@100.614,37.415 ; IC36.53@100.614,37.415 IC36.53@100.864,37.665
  Top w0.254: v2(7.7,0) R47.1@6.8,0 6.8,-1.7 C36.2@6.9,-1.8 v2(7.8,-1.8) ; T7.2@8.55,3.15 v2(8.55,4.13) ; T8.2@12.45,3.15 v2(12.45,4.13) ; T5.2@16.25,3.15 v2(16.25,4.13) ; T6.2@19.85,3.05 v2(19.85,4.03) ; R49.2@108.58,-1.85 108.58,-0.88 108.94,-0.52 IC3.1@110.249,-0.52 ; v2(137.23,45.789) C113.1@137.23,46.7 ; IC40.6@139.961,47.65 v2(139.961,48.72) ; IC44.3@140.2,8.735 141.479,8.735 ; IC44.1@140.267,6.245 141.319,6.245 141.479,6.405 141.479,7.465 141.479,8.735 ; IC40.4@140.611,43.25 140.611,42.169 v2(140.63,42.15) ; IC40.5@140.611,47.65 v2(140.611,48.72) ; v2(141.479,10.005) 141.479,8.735 ; IC43.1@150.43,6.245 151.482,6.245 151.692,6.455 151.692,7.47 ; IC43.2@150.43,7.515 151.647,7.515 151.692,7.47 ; IC43.3@150.43,8.785 151.692,8.785 ; IC43.4@150.456,10.029 151.692,10.029 151.692,8.785 ; C112.1@161.1,10.55 v2(161.1,11.2) ; v2(163.853,10.65) T11.2@164.65,10.65 ; IC39.1@164.08,6.405 165.145,6.405 v2(165.15,6.4) ; IC13.4@166.75,58.45 v1(166.75,59.148) ; v2(166.88,-1.4) T10.2@167.78,-1.4 ; v2(167.55,10.3) C109.1@168.5,10.3 ; C110.1@170.35,8 170.917,8 v2(170.922,8.005) ; v2(172.15,1.91) C111.1@172.15,2.6 ; IC46.12@174.8,0.75 173.642,0.75 173.407,0.986 173.407,1.4 ; IC46.11@174.8,1.4 173.407,1.4 ; IC46.10@174.8,2.05 173.407,2.05 ; IC46.9@174.8,2.7 173.407,2.7 ; IC46.8@174.8,3.35 v2(173.407,3.35) 173.407,2.7 ; v2(179.425,9.75) IC37.7@180.6,9.75 ; v2(180.5,14.4) C118.2@181.8,14.4 ; IC41.2@187,12.5 187.725,12.5 188.475,13.25 C117.1@189.13,13.25 v2(190.079,13.25) ; 151.692,7.47 151.692,8.785 ; 173.407,1.4 173.407,2.05 ; 173.407,2.05 173.407,2.7
  Top w0.381: R117.1@140.3,49.558 v2(141.068,49.558)
  Top w0.762: v1(125.194,61.88) C59.1@125.194,62.73 ; C55.1@148.853,62.901 v1(149.62,62.901)
  Top w1: v4(162.69,85.95) D16.2@165.3,85.95 167.6,88.25 171.175,88.25 ; v4(165.33,75.666) C114.1@165.33,76.95 ; v4(167.73,75.65) C115.1@167.73,76.95 ; FL1.4@171.175,85.35 171.175,88.25 ; v4(174.775,76.005) FL1.4@174.775,78.05 ; FL1.4@177.025,88.25 171.175,88.25
  L3 w0.203: v2(4.509,89.907) v2@4.547,89.907
  other v1: 61.891,12.512 64.162,12.548 108.694,21.63 61.891,22.512 64.162,22.548 105.744,26.88 61.891,32.512 64.162,32.548 98.414,34.665 99.514,34.665 100.614,34.665 101.714,34.665 98.414,35.765 99.514,35.765 100.614,35.765 102.814,35.765 98.414,36.865 99.514,36.865 101.714,36.865 102.814,36.865 98.414,37.965 99.514,37.965 100.614,37.965 101.714,37.965 102.814,37.965 98.414,39.065 99.514,39.065 100.614,39.065 101.714,39.065 102.814,39.065 98.414,40.165 99.514,40.165 100.614,40.165 101.714,40.165 102.814,40.165 61.891,42.512 64.162,42.548 61.891,52.512 64.162,52.548 61.903,62.468 64.175,62.504 151.452,64.389 114.894,66.73 61.891,72.512 64.162,72.548 155.216,72.912 116.769,78.33 112.419,80.955 61.891,82.512 64.162,82.548 111.707,89.336
  other v5: 136.641,59.095 136.641,60.87
I2C_SCL1: D18.6 IC18.1 IC44.6 J2.27 | length 59.4
  Top w0.203: IC44.6@134.867,8.785 137.43,8.785 ; IC18.1@136.2,1.95 136.2,3.5 137.43,4.73 137.43,8.785 ; v2(137.43,10.055) 137.43,8.785 ; v2(168.15,13.925) 169.425,13.925 169.9,13.45 D18.6@171.2,13.45
  L3 w0.203: v2@137.318,9.943 v2(137.43,10.055) 138.885,11.51 153.31,11.51 155.4,13.6 167.825,13.6 v2(168.15,13.925) 168.921,14.696 168.921,20.953 171.484,23.516 J2.27@173.002,23.516
I2C_SDA1: D18.4 IC18.3 IC44.5 J2.26 | length 65.9
  Top w0.203: IC44.5@134.867,10.055 v2(136.43,10.055) ; v2(135.2,0.05) IC18.3@136.2,0.05 ; v2@168.325,14.75 D18.4@171.2,14.75
  L3 w0.203: v2(136.43,10.055) 138.411,12.036 153.136,12.036 155.083,13.983 167.358,13.983 v2(168.15,14.775) 168.15,21.264 171.686,24.8 174.286,24.8 J2.26@175.542,26.056
  Bot w0.203: v2(135.2,0.05) 135.98,0.05 136.431,0.501 v2(136.43,10.055)
IN_0_N: C4A.2 C6A.2 IC36.47 R6A.2 | length 51.1
  Top w0.152: R6A.2@90.603,78.426 92.033,78.426 C4A.2@92.353,78.106 92.503,78.256 C6A.2@92.503,79.956 92.503,80.139 93.094,80.73 93.858,80.73 94.644,79.944 94.644,73.205 99.169,68.68 101.22,68.68 v1(101.394,68.506) ; IC36.47@100.364,41.34 100.364,42.079 v1(100.44,42.155)
  L3 w0.152: v1(100.44,42.155) 100.266,42.329 100.266,52.314 99.635,52.946 99.635,62.596 99.899,62.86 99.899,67.93 100.649,68.68 101.22,68.68 v1(101.394,68.506)
IN_0_P: C6A.1 C7A.1 IC36.48 R12A.2 | length 51.6
  Top w0.152: C6A.1@90.703,79.956 90.703,81.636 R12A.2@90.603,81.736 90.923,82.056 C7A.1@92.353,82.056 92.568,82.056 93.589,81.035 93.984,81.035 94.949,80.07 94.949,73.331 99.295,68.985 101.22,68.985 v1(101.394,69.159) ; v1(99.788,42.155) 99.864,42.079 IC36.48@99.864,41.34
  L3 w0.152: v1(99.788,42.155) 99.962,42.329 99.962,52.187 99.419,52.73 99.33,52.819 99.33,62.722 99.419,62.811 99.594,62.986 99.594,68.056 100.523,68.985 101.22,68.985 v1(101.394,69.159)
IN_1_N: C4B.2 C6B.2 IC36.50 R6B.2 | length 39.4
  Top w0.152: R6B.2@90.603,68.426 92.033,68.426 C4B.2@92.353,68.106 92.503,68.256 C6B.2@92.503,69.956 93.069,70.522 93.069,70.68 93.328,70.68 93.348,70.66 v1(93.348,70.634) 93.532,70.817 94.544,70.817 97.931,67.43 98.77,67.43 v1(98.944,67.256) ; v1(98.719,42.365) 98.719,42.224 98.864,42.079 IC36.50@98.864,41.34
  L3 w0.152: v1(98.719,42.365) 98.719,42.43 98.494,42.655 98.494,43.183 98.766,43.455 98.766,51.989 98.333,52.422 98.333,67.394 98.369,67.43 98.77,67.43 v1(98.944,67.256)
IN_1_P: C6B.1 C7B.1 IC36.51 R12B.2 | length 40
  Top w0.152: C6B.1@90.703,69.956 90.603,70.056 R12B.2@90.603,71.736 91.875,71.736 92.195,72.056 C7B.1@92.353,72.056 92.543,72.056 93.244,71.355 93.303,71.355 v1(93.353,71.305) 93.536,71.122 94.67,71.122 98.057,67.735 98.77,67.735 v1(98.944,67.909) ; v1(97.969,42.33) 98.113,42.33 98.24,42.202 98.24,42.167 98.364,42.044 IC36.51@98.364,41.34
  L3 w0.152: v1(97.969,42.33) 98.189,42.55 98.189,43.309 98.462,43.581 98.462,51.862 98.028,52.296 98.028,67.521 98.243,67.735 98.77,67.735 v1(98.944,67.909)
IN_2_N: C4C.2 C6C.2 IC36.1 R6C.2 | length 31.6
  Top w0.152: R6C.2@90.616,58.382 92.046,58.382 C4C.2@92.366,58.062 92.366,59.762 C6C.2@92.516,59.912 92.516,60.202 92.712,60.005 93.53,60.005 94.341,60.815 95.895,60.815 v1(96.069,60.641) ; v1(96.344,40.98) 96.644,40.68 96.644,40.665 IC36.1@97.189,40.665
  L3 w0.152: v1(96.069,60.641) 96.243,60.815 96.669,60.815 96.719,60.765 96.719,56.699 97.144,56.274 97.144,55.58 96.919,55.355 96.83,55.266 96.83,41.996 97.396,41.43 97.396,40.872 97.091,40.568 96.756,40.568 v1(96.344,40.98)
IN_2_P: C6C.1 C7C.1 IC36.2 R12C.2 | length 32.4
  Top w0.152: C6C.1@90.716,59.912 90.616,60.012 R12C.2@90.616,61.692 92.046,61.692 C7C.1@92.366,62.012 93.392,62.012 94.285,61.12 95.895,61.12 v1(96.069,61.294) ; v1(96.174,40.207) 96.328,40.207 96.37,40.165 IC36.2@97.189,40.165
  L3 w0.152: v1(96.069,61.294) 96.243,61.12 96.795,61.12 97.024,60.891 97.024,56.825 97.449,56.4 97.449,55.454 97.135,55.139 97.135,42.122 97.702,41.555 97.702,40.747 97.218,40.263 96.229,40.263 v1(96.174,40.207)
IN_3_N: C4D.2 C6D.2 IC36.4 R6D.2 | length 21.5
  Top w0.152: R6D.2@90.603,48.426 92.033,48.426 C4D.2@92.353,48.106 92.353,49.806 C6D.2@92.503,49.956 92.503,50.039 93.264,50.8 95.67,50.8 v1(95.844,50.626) ; v1(96.344,39.242) 96.42,39.165 IC36.4@97.189,39.165
  L3 w0.152: v1(95.844,50.626) 95.47,50.626 95.319,50.475 95.319,39.218 95.469,39.068 96.17,39.068 v1(96.344,39.242)
IN_3_P: C6D.1 C7D.1 IC36.5 R12D.2 | length 22.7
  Top w0.152: C6D.1@90.703,49.956 90.703,51.636 R12D.2@90.603,51.736 90.923,52.056 C7D.1@92.353,52.056 92.493,52.056 93.444,51.105 95.67,51.105 v1(95.844,51.279) ; v1(96.344,38.589) 96.42,38.665 IC36.5@97.189,38.665
  L3 w0.152: v1(95.844,51.279) 95.67,51.105 95.518,51.105 95.014,50.601 95.014,39.092 95.343,38.763 96.17,38.763 v1(96.344,38.589)
IN_4_N: C4E.2 C6E.2 IC36.10 R6E.2 | length 13
  Top w0.152: R6E.2@90.603,38.426 92.033,38.426 C4E.2@92.353,38.106 92.503,38.256 C6E.2@92.503,39.956 92.503,40.064 93.244,40.805 ; 93.218,40.805 93.244,40.805 ; v1(93.869,40.706) 93.77,40.805 93.244,40.805
  L3 w0.152: v1(93.869,40.706) 93.695,40.88 93.319,40.88 92.891,40.452 92.891,38.971 95.605,36.257 v1(96.449,36.257)
IN_4_P: C6E.1 C7E.1 IC36.11 R12E.2 | length 15
  Top w0.152: C6E.1@90.703,39.956 90.703,41.636 R12E.2@90.603,41.736 90.923,42.056 C7E.1@92.353,42.056 92.468,42.056 93.369,41.155 93.369,41.13 93.616,41.13 93.845,41.359 v1(93.869,41.359) ; v1(96.149,35.632) 96.182,35.665 IC36.11@97.189,35.665
  L3 w0.152: v1(93.869,41.359) 93.695,41.185 93.193,41.185 92.586,40.578 92.586,38.845 95.668,35.763 95.769,35.763 95.9,35.632 v1(96.149,35.632)
IN_5_N: C4F.2 C6F.2 IC36.13 R6F.2 | length 14.9
  Top w0.152: R6F.2@90.603,28.426 92.033,28.426 C4F.2@92.353,28.106 92.503,28.256 C6F.2@92.503,29.956 92.503,30.164 93.089,30.75 95.195,30.75 95.225,30.78 v1(95.349,30.657) ; v1(96.319,34.742) 96.395,34.665 IC36.13@97.189,34.665
  L3 w0.152: v1@95.225,30.78 95.27,30.825 96.62,30.825 97.699,31.904 97.699,34.184 97.315,34.568 96.493,34.568 v1(96.319,34.742)
IN_5_P: C6F.1 C7F.1 IC36.14 R12F.2 | length 14.2
  Top w0.152: C6F.1@90.703,29.956 90.603,30.056 R12F.2@90.603,31.736 92.033,31.736 C7F.1@92.353,32.056 92.568,32.056 93.569,31.055 95.069,31.055 v1(95.344,31.33) ; v1(96.294,33.88) 96.579,34.165 IC36.14@97.189,34.165
  L3 w0.152: v1(95.344,31.33) 95.494,31.33 95.694,31.13 96.494,31.13 97.394,32.03 97.394,34.058 97.189,34.263 96.493,34.263 96.294,34.064 v1(96.294,33.88)